# Altium PCB Car2014_finalRev.PcbDoc (part 2 of 2)
Units mm, origin at the board's own origin, x right, y up, seen from the top; angles counter-clockwise.
Board outline 109.6 x 77.2 mm, 4 copper layers (Top Layer, Mid-Layer 1, Mid-Layer 2, Bottom Layer); 157 components, 134 nets, 684 pads, 193 vias.
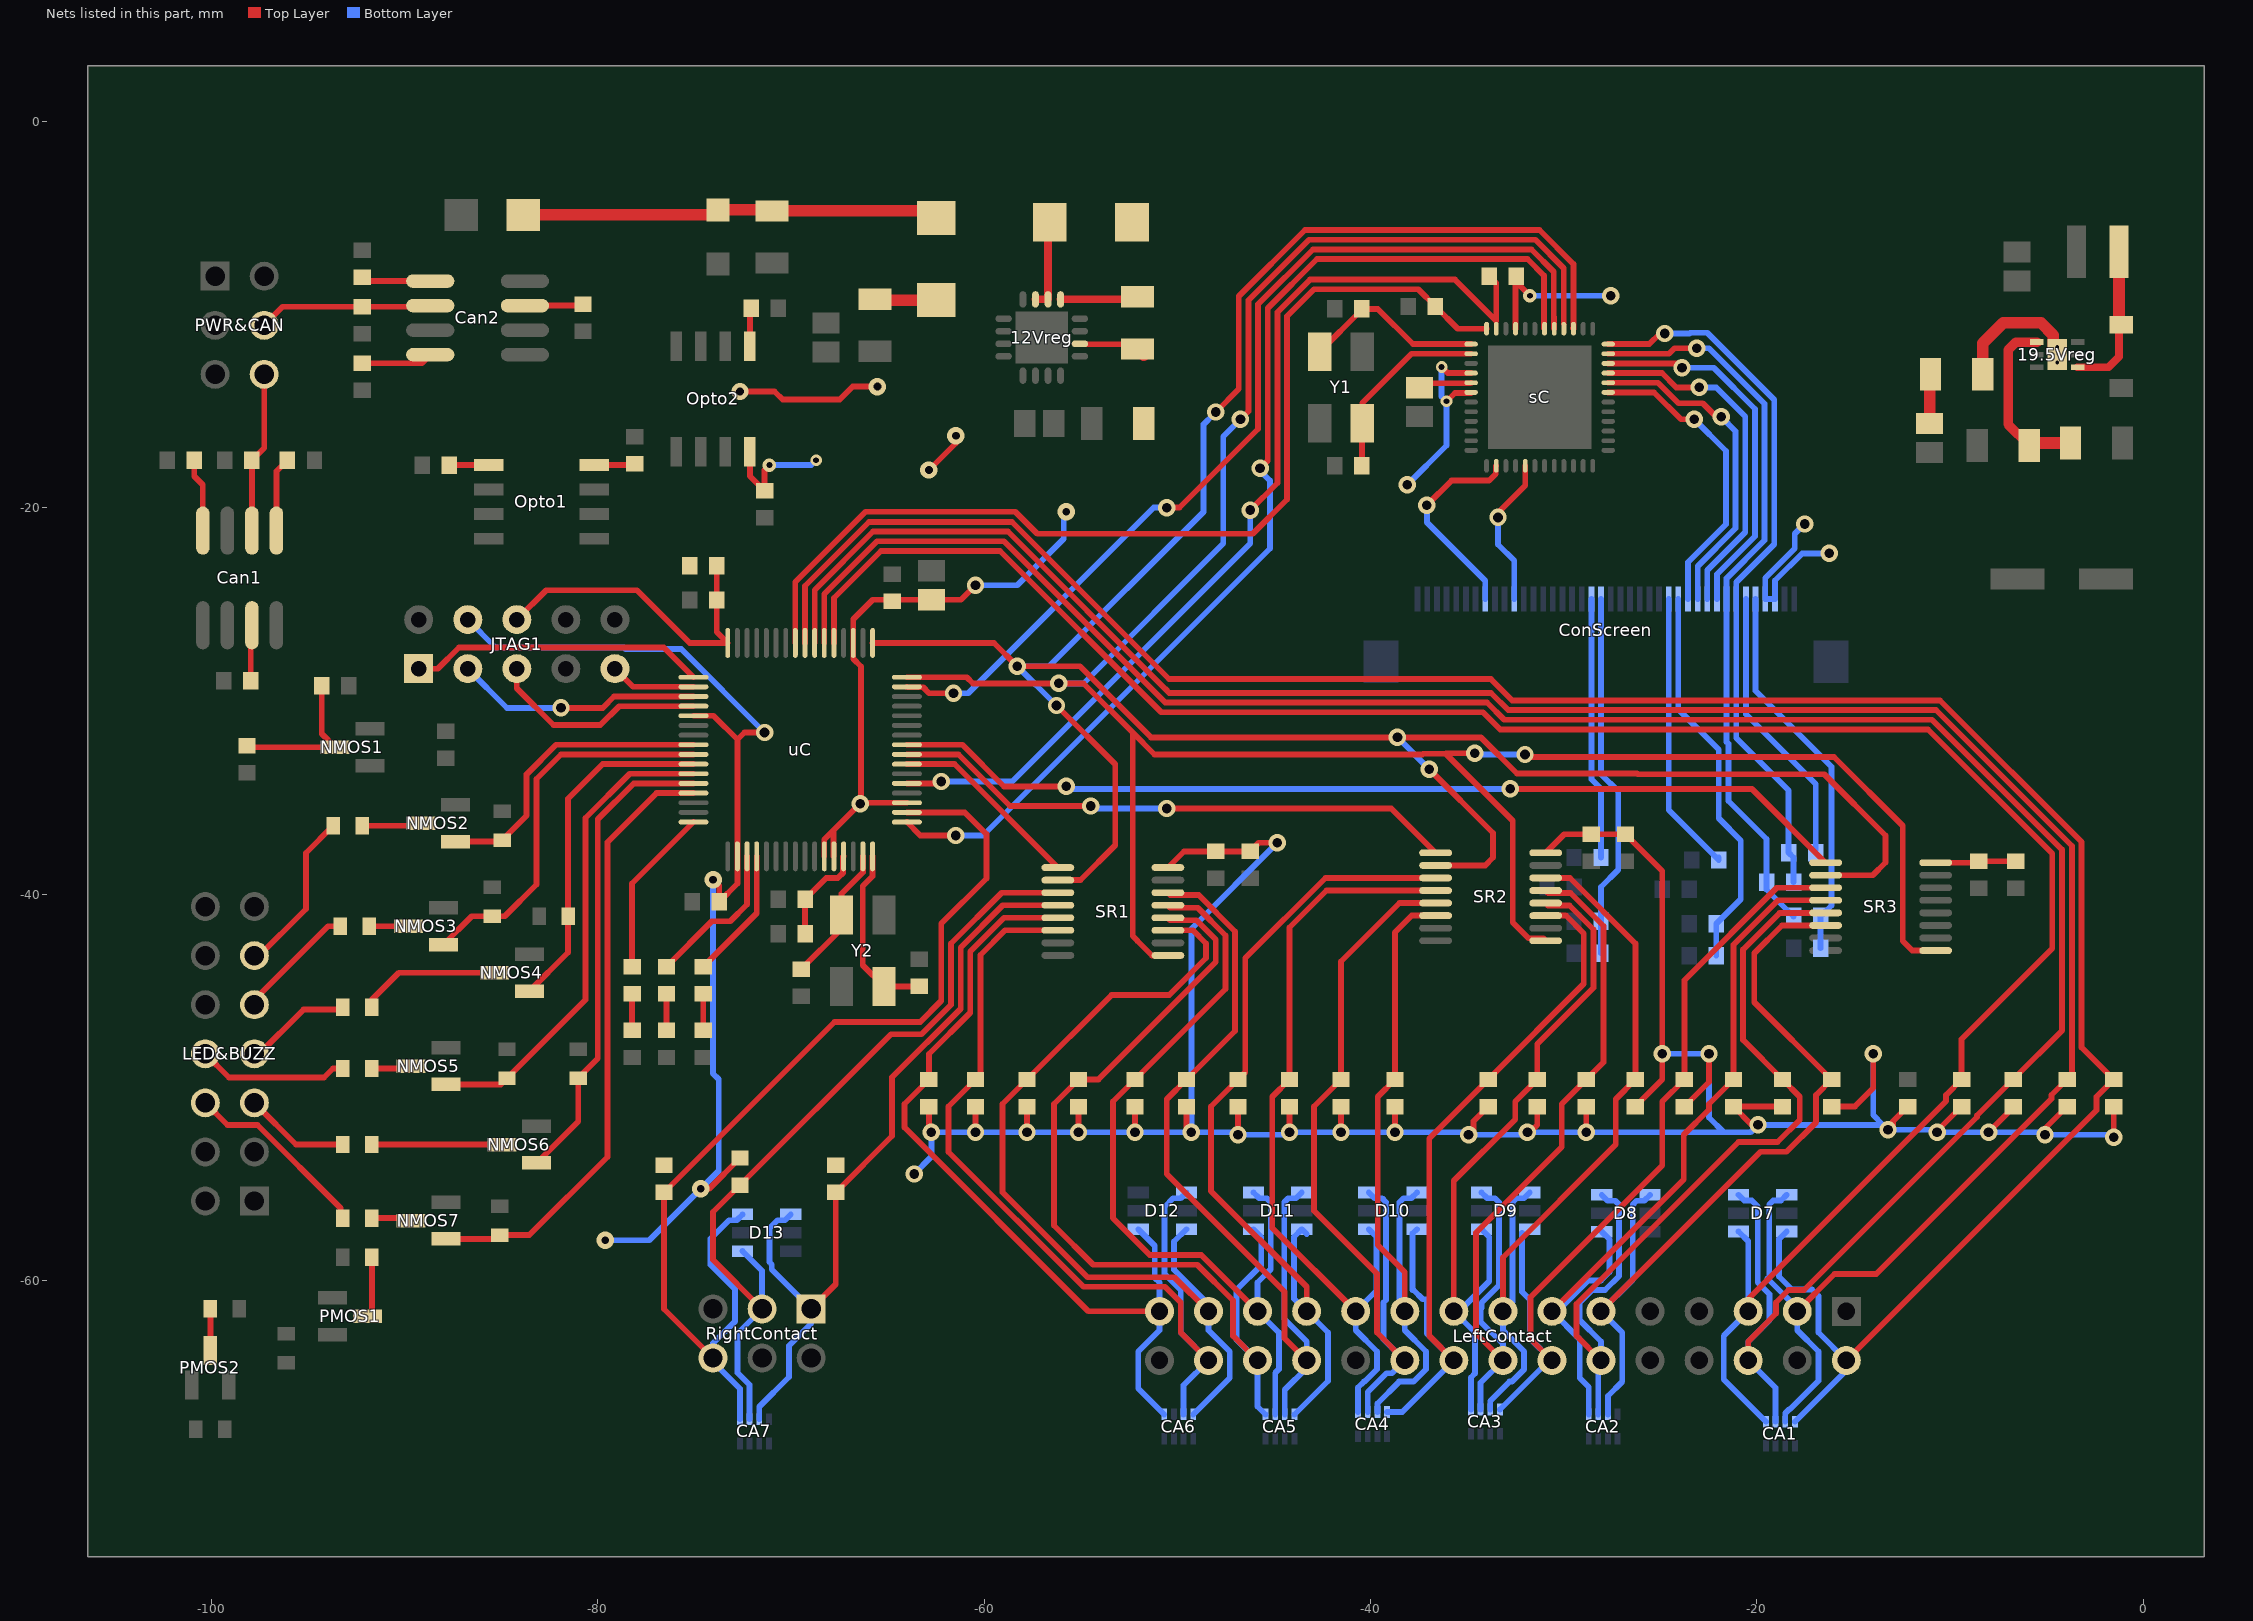
[diagram p4: the nets of this part, all layers, seen from the top]

## Via types
v1: diameter 0.9, hole 0.5, Top Layer to Bottom Layer, 127 vias
v2: diameter 0.5, hole 0.2, Top Layer to Bottom Layer, 36 vias
v3: diameter 0.9, hole 0.4, Top Layer to Bottom Layer, 13 vias
v4: diameter 0.7, hole 0.3, Top Layer to Bottom Layer, 7 vias
v5: diameter 3.5, hole 3.2, Top Layer to Bottom Layer, 4 vias
v6: diameter 0.6, hole 0.3, Top Layer to Bottom Layer, 3 vias
v7: diameter 1.5, hole 0.9, Top Layer to Bottom Layer, 2 vias
v8: diameter 0.8, hole 0.4, Top Layer to Bottom Layer, 1 vias

## Nets (pads, with @x,y where several pads share a name; then routed paths per layer and width w, separated by ;. In a path a pad name is that pad's centre, name@x,y a point inside that pad or via, vN(x,y) a via of type N, cw(c..) or ccw(c..) an arc to the next point about the centre after c; other vN are vias at no path point) (continued)
INTRPT_DCON: R4.1 sC.11 uC.37 | length 50.9
  Top Layer w0.3: uC.37@-64.006,-34.262 -62.329,-34.262 v1(-62.23,-34.163) ; v1(-46.228,-20.109) -44.823,-18.704 -44.823,-9.869 -43.133,-8.179 -35.633,-8.179 -33.492,-10.32 -33.492,-8.356 R4.1@-33.847,-8.001
  Bottom Layer w0.3: v1(-62.23,-34.163) -58.547,-34.163 -46.228,-21.844 v1(-46.228,-20.109)
JOYSTICK1: CA1.4 D7.3 LeftContact.2 R48.2 uC.56 | length 123.7
  Top Layer w0.3: uC.56@-69.281,-26.987 -69.281,-24.035 -65.971,-20.725 -58.569,-20.725 -50.433,-28.861 -33.77,-28.861 -32.665,-29.966 -10.513,-29.966 -3.183,-37.296 -3.183,-47.933 R48.2@-1.524,-49.592 -2.413,-50.481 -2.413,-51.181 LeftContact.2@-15.367,-64.135
  Bottom Layer w0.3: D7.3@-18.453,-57.462 -18.853,-57.862 -18.853,-59.786 -18.175,-60.463 -17.145,-60.463 -16.807,-60.801 -16.807,-62.695 LeftContact.2@-15.367,-64.135 -15.367,-64.652 CA1.4@-18.029,-67.314
JOYSTICK2: CA1.3 D7.1 LeftContact.3 R47.2 uC.55 | length 121.3
  Top Layer w0.3: uC.55@-68.781,-26.987 -68.781,-24.242 -65.764,-21.225 -58.776,-21.225 -50.64,-29.361 -50.635,-29.361 -50.419,-29.577 -33.762,-29.577 -32.873,-30.466 -10.72,-30.466 -3.683,-37.503 -3.683,-49.338 R47.2@-3.937,-49.592 -4.737,-50.392 -4.737,-50.584 -13.816,-59.663 -15.975,-59.663 LeftContact.3@-17.907,-61.595
  Bottom Layer w0.3: CA1.3@-18.529,-67.314 -18.529,-66.869 -18.324,-66.664 -18.277,-66.664 -16.807,-65.194 -16.807,-63.679 -17.907,-62.579 LeftContact.3@-17.907,-61.595 -17.907,-61.439 -19.447,-59.899 -19.353,-59.805 -19.353,-56.067 -19.148,-55.862 -18.753,-55.862 D7.1@-18.453,-55.562
JOYSTICK3: CA1.1 D7.4 LeftContact.5 R45.2 uC.53 | length 114.6
  Top Layer w0.3: uC.53@-67.781,-26.987 -67.781,-24.656 -65.35,-22.225 -59.19,-22.225 -50.838,-30.577 -34.176,-30.577 -33.287,-31.466 -11.134,-31.466 -4.707,-37.893 -4.707,-42.814 -9.398,-47.505 R45.2@-9.398,-49.592 -10.198,-50.392 -10.198,-50.711 -20.447,-60.96 LeftContact.5@-20.447,-61.595
  Bottom Layer w0.3: D7.4@-20.953,-57.462 -20.447,-57.968 LeftContact.5@-20.447,-61.595 -21.717,-62.865 -21.717,-65.126 CA1.1@-19.529,-67.314
JOYSTICK4: CA1.2 D7.6 LeftContact.6 R46.2 uC.54 | length 121.7
  Top Layer w0.3: uC.54@-68.281,-26.987 -68.281,-24.449 -65.557,-21.725 -58.983,-21.725 -50.631,-30.077 -33.969,-30.077 -33.08,-30.966 -10.927,-30.966 -4.207,-37.686 -4.207,-47.036 -4.191,-47.052 R46.2@-6.731,-49.592 -8.598,-51.459 -8.598,-51.537 -17.556,-60.495 -18.363,-60.495 -19.007,-61.139 -19.007,-61.711 -20.447,-63.151 LeftContact.6@-20.447,-64.135
  Bottom Layer w0.3: D7.6@-20.953,-55.562 -20.653,-55.862 -20.258,-55.862 -19.947,-56.173 -19.947,-60.106 -19.347,-60.706 -19.347,-62.051 -20.447,-63.151 LeftContact.6@-20.447,-64.135 -19.029,-65.553 CA1.2@-19.029,-67.314
JTAG_RESET: C20.2 JTAG1.8 R11.2 uC.64 | length 16.9
  Top Layer w0.3: JTAG1.8@-84.201,-25.781 -82.677,-24.257 -77.978,-24.257 -75.248,-26.987 uC.64@-73.281,-26.987 -73.849,-26.419 C20.2@-73.849,-24.765 R11.2@-73.849,-22.987
JTAG_TCK: JTAG1.1 uC.1 | length 15.3
  Top Layer w0.3: JTAG1.1@-89.281,-28.321 -88.297,-28.321 -87.197,-27.221 -76.597,-27.221 uC.1@-75.056,-28.762
JTAG_TDI: JTAG1.5 uC.2 | length 4.5
  Top Layer w0.3: JTAG1.5@-79.121,-28.321 -78.18,-29.262 uC.2@-75.056,-29.262
JTAG_TDO: JTAG1.2 uC.3 | length 12.8
  Top Layer w0.3: v1(-81.915,-30.353) -79.756,-30.353 -79.165,-29.762 uC.3@-75.056,-29.762
  Bottom Layer w0.3: JTAG1.2@-86.741,-28.321 -84.709,-30.353 v1(-81.915,-30.353)
JTAG_TMS: JTAG1.3 uC.4 | length 11.4
  Top Layer w0.3: JTAG1.3@-84.201,-28.321 -84.201,-29.337 -82.296,-31.242 -79.883,-31.242 -78.903,-30.262 uC.4@-75.056,-30.262
KERS1: CA2.3 D8.4 LeftContact.11 R43.1 SR3.6 | length 43.6
  Top Layer w0.3: LeftContact.11@-28.067,-61.595 -19.804,-53.332 -18.462,-53.332 -16.929,-51.799 -16.929,-50.392 R43.1@-16.129,-49.592 -20.133,-45.588 -20.133,-43.056 -18.692,-41.615 SR3.6@-16.439,-41.615
  Bottom Layer w0.3: CA2.3@-27.707,-66.933 -27.707,-65.975 -26.967,-65.235 -26.967,-62.695 LeftContact.11@-28.067,-61.595 -26.429,-59.957 -26.429,-56.073 -26.224,-55.868 -25.829,-55.868 D8.4@-25.529,-55.568
KERS2: CA3.4 D9.6 LeftContact.14 R40.1 SR3.3 | length 43.7
  Top Layer w0.3: LeftContact.14@-30.607,-64.135 -31.714,-63.028 -31.714,-60.869 -24.892,-54.047 -24.892,-50.735 R40.1@-23.749,-49.592 -23.749,-44.45 -18.964,-39.665 SR3.3@-16.439,-39.665
  Bottom Layer w0.3: CA3.4@-33.303,-66.679 -30.759,-64.135 LeftContact.14@-30.607,-64.135 -31.752,-62.99 -31.752,-60.979 -32.152,-60.579 D9.6@-32.152,-57.531
KERS3: CA2.1 D8.1 LeftContact.13 R41.1 SR3.4 | length 40.8
  Top Layer w0.3: LeftContact.13@-30.607,-61.595 -23.787,-54.775 -23.787,-52.451 -22.479,-51.143 -22.479,-50.862 R41.1@-21.209,-49.592 -21.209,-42.617 -18.907,-40.315 SR3.4@-16.439,-40.315
  Bottom Layer w0.3: CA2.1@-28.707,-66.933 -28.707,-65.511 -29.167,-65.051 -29.167,-63.035 LeftContact.13@-30.607,-61.595 -30.33,-61.595 -28.73,-59.995 -28.063,-59.995 -27.629,-59.561 -27.629,-57.868 D8.1@-28.029,-57.468
KERS4: CA2.2 D8.3 LeftContact.12 R42.1 SR3.5 | length 47.8
  Top Layer w0.3: LeftContact.12@-28.067,-64.135 -29.337,-62.865 -29.337,-61.214 -20.955,-52.832 -18.923,-52.832 -17.78,-51.689 -17.78,-50.481 R42.1@-18.669,-49.592 -20.709,-47.552 -20.709,-42.855 -18.819,-40.965 SR3.5@-16.439,-40.965
  Bottom Layer w0.3: CA2.2@-28.207,-66.933 -28.207,-64.275 LeftContact.12@-28.067,-64.135 -28.067,-63.151 -29.167,-62.051 -29.167,-61.139 -28.523,-60.495 -27.856,-60.495 -27.129,-59.768 -27.129,-56.073 -27.334,-55.868 -27.729,-55.868 D8.3@-28.029,-55.568
KERS5: CA3.3 D9.4 LeftContact.15 R39.1 SR2.14 | length 41.2
  Top Layer w0.3: LeftContact.15@-33.147,-61.595 -33.147,-58.801 -27.305,-52.959 -27.305,-50.608 R39.1@-26.289,-49.592 -26.289,-42.545 -29.677,-39.157 SR2.14@-30.932,-39.157
  Bottom Layer w0.3: CA3.3@-33.803,-66.679 -33.803,-66.234 -32.804,-65.235 -32.691,-65.235 -32.047,-64.591 -32.047,-63.679 -33.147,-62.579 LeftContact.15@-33.147,-61.595 -32.652,-61.1 -32.652,-55.946 -32.447,-55.741 -32.052,-55.741 D9.4@-31.752,-55.441
KERS6: CA4.4 D10.6 LeftContact.18 R36.1 SR2.11 | length 40.8
  Top Layer w0.3: LeftContact.18@-35.687,-64.135 -36.957,-62.865 -36.957,-52.64 R36.1@-33.909,-49.592 -28.956,-44.639 -28.956,-42.037 -29.886,-41.107 SR2.11@-30.932,-41.107
  Bottom Layer w0.3: CA4.4@-39.145,-66.806 -38.358,-66.806 LeftContact.18@-35.687,-64.135 -37.084,-62.738 -37.084,-60.968 -37.298,-60.968 -37.771,-60.495 -37.824,-60.495 -37.824,-57.571 D10.6@-37.594,-57.341
KERS7: CA3.2 D9.3 LeftContact.16 R38.1 SR2.13 | length 42.7
  Top Layer w0.3: LeftContact.16@-33.147,-64.135 -34.544,-62.738 -34.544,-57.531 -30.099,-53.086 -30.099,-50.862 R38.1@-28.829,-49.592 -27.94,-48.703 -27.94,-41.639 -29.647,-39.932 -30.807,-39.932 SR2.13@-30.932,-39.807
  Bottom Layer w0.3: CA3.2@-34.303,-66.679 -34.303,-65.291 LeftContact.16@-33.147,-64.135 -33.147,-63.289 -34.29,-62.146 -34.29,-61.468 -34.247,-61.425 -34.247,-61.139 -33.352,-60.244 -33.352,-55.946 -33.557,-55.741 -33.952,-55.741 D9.3@-34.252,-55.441
KERS8: CA4.3 D10.4 LeftContact.19 R35.1 SR2.6 | length 37
  Top Layer w0.3: LeftContact.19@-38.227,-61.595 -38.227,-59.563 -39.624,-58.166 -39.624,-50.481 R35.1@-38.735,-49.592 -38.735,-41.973 -37.869,-41.107 SR2.6@-36.632,-41.107
  Bottom Layer w0.3: CA4.3@-39.645,-66.806 -39.645,-66.361 -38.519,-65.235 -37.771,-65.235 -37.127,-64.591 -37.127,-63.679 -38.227,-62.579 LeftContact.19@-38.227,-61.595 -38.494,-61.328 -38.494,-55.946 -38.289,-55.741 -37.894,-55.741 D10.4@-37.594,-55.441
KERS9: CA3.1 D9.1 LeftContact.17 R37.1 SR2.12 | length 36.9
  Top Layer w0.3: LeftContact.17@-35.568,-61.476 LeftContact.17@-35.687,-61.595 -35.687,-54.838 -32.512,-51.663 -32.512,-50.735 R37.1@-31.369,-49.592 -31.369,-47.759 -28.456,-44.846 -28.456,-41.83 -29.704,-40.582 -30.807,-40.582 SR2.12@-30.932,-40.457
  Bottom Layer w0.3: CA3.1@-34.803,-66.679 -34.803,-65.023 -34.587,-64.807 -34.587,-62.695 LeftContact.17@-35.687,-61.595 -35.41,-61.595 -33.852,-60.037 -33.852,-57.741 D9.1@-34.252,-57.341
L1CAN: Can1.6 PWR&CAN.6 R7.1 | length 8.4
  Top Layer w0.3: Can1.6@-97.917,-21.172 -97.914,-21.169 R7.1@-97.914,-17.526 -97.282,-16.894 PWR&CAN.6@-97.282,-13.081
L2CAN: Can2.6 PWR&CAN.4 R1.1 | length 9
  Top Layer w0.3: PWR&CAN.4@-97.282,-10.541 -96.328,-9.587 R1.1@-92.202,-9.587 -88.745,-9.587 Can2.6@-88.683,-9.525
LC_IN: CA7.1 D13.6 R50.2 RightContact.6 uC.34 | length 55.4
  Top Layer w0.3: RightContact.6@-74.041,-64.008 -76.581,-61.468 R50.2@-76.581,-55.437 -67.753,-46.609 -63.318,-46.609 -62.222,-45.513 -62.222,-41.521 -59.887,-39.186 -59.887,-36.887 -61.012,-35.762 uC.34@-64.006,-35.762
  Bottom Layer w0.3: CA7.1@-72.649,-67.187 -72.649,-65.599 -74.041,-64.207 RightContact.6@-74.041,-64.008 -74.041,-63.246 -72.898,-62.103 -72.898,-60.452 -74.168,-59.182 -74.168,-57.836 -73.21,-56.878 -72.815,-56.878 D13.6@-72.515,-56.578
LC_LED: LED&BUZZ.6 R53.1 | length 10
  Top Layer w0.3: LED&BUZZ.6@-100.33,-50.8 -99.187,-51.943 -97.631,-51.943 -93.313,-56.261 -93.313,-56.662 R53.1@-93.206,-56.769 R53.1@-93.206,-56.599
LED1: D4.1 uC.16 | length 8.8
  Top Layer w0.3: D4.1@-78.232,-43.75 -78.232,-39.438 uC.16@-75.056,-36.262
LED2: D5.1 uC.19 | length 8
  Top Layer w0.3: D5.1@-76.454,-43.75 -74.106,-41.402 -73.152,-41.402 -72.281,-40.531 uC.19@-72.281,-38.037
LED3: D6.1 uC.20 | length 6.9
  Top Layer w0.3: D6.1@-74.549,-43.75 -71.781,-40.982 uC.20@-71.781,-38.037
LED_1: LED&BUZZ.9 R16.2 | length 6.2
  Top Layer w0.3: LED&BUZZ.9@-98.171,-45.847 -93.98,-41.656 -93.714,-41.656
LED_2: LED&BUZZ.7 R19.2 | length 5.5
  Top Layer w0.3: LED&BUZZ.7@-97.663,-48.387 -95.25,-45.974 -93.333,-45.974 R19.2@-93.206,-45.847
LED_3: LED&BUZZ.8 R20.2 | length 7.8
  Top Layer w0.3: LED&BUZZ.8@-100.33,-48.26 -99.103,-49.487 -94.179,-49.487 -93.714,-49.022 R20.2@-93.206,-49.022
LED_4: LED&BUZZ.5 R49.2 | length 5.3
  Top Layer w0.3: LED&BUZZ.5@-97.663,-50.927 -95.631,-52.959 R49.2@-93.206,-52.959
LED_5: LED&BUZZ.11 R14.2 | length 8.5
  Top Layer w0.3: LED&BUZZ.11@-97.663,-43.307 -95.123,-40.767 -95.123,-37.858 R14.2@-93.714,-36.449
MISO: sC.4 SR1.9 SR2.9 SR3.9 uC.48 | length 133.2
  Top Layer w0.3: uC.48@-64.006,-28.762 -60.9,-28.762 -60.579,-29.083 v1@-56.388,-29.083 ; v1(-56.134,-29.083) -54.864,-29.083 -52.316,-31.631 ; SR1.9@-50.49,-43.169 -51.319,-43.169 -52.07,-42.418 -52.07,-42.414 -52.316,-42.168 -52.316,-31.631 ; v1(-46.736,-15.41) -46.323,-14.997 -46.323,-9.248 -43.187,-6.112 -31.463,-6.112 -29.992,-7.583 sC.4@-29.992,-10.46 ; v1(-34.608,-32.703) -36.081,-32.703 -36.106,-32.728 ; v1(-32.004,-32.766) -31.877,-32.893 -16.002,-32.893 -12.446,-36.449 -12.446,-42.418 -11.949,-42.915 SR3.9@-10.739,-42.915 ; SR2.9@-30.932,-42.407 -31.057,-42.282 -31.824,-42.282 -32.639,-41.467 -32.639,-36.195 -36.106,-32.728 ; -52.316,-31.631 -51.181,-32.766 -37.326,-32.766 -37.288,-32.728 -36.106,-32.728
  Bottom Layer w0.3: v1(-56.134,-29.083) -54.864,-29.083 -47.625,-21.844 -47.625,-16.299 v1(-46.736,-15.41) ; v1(-34.608,-32.703) -34.544,-32.766 v1(-32.004,-32.766)
MOSI: sC.5 uC.47 | length 51
  Top Layer w0.3: uC.47@-64.006,-29.262 -63.981,-29.287 -63.159,-29.287 -62.855,-29.591 v1(-61.595,-29.591) ; v1(-50.546,-19.982) -49.887,-19.982 -45.823,-15.918 -45.823,-9.455 -42.98,-6.612 -31.67,-6.612 -30.517,-7.765 -30.517,-10.692 sC.5@-30.492,-10.717 -30.492,-10.113
  Bottom Layer w0.3: v1(-61.595,-29.591) -60.833,-29.591 -51.224,-19.982 v1(-50.546,-19.982)
Net12Vreg_13: 12Vreg.13 R3.1 | length 4
  Top Layer w0.4: 12Vreg.13@-56.048,-9.201 -52.207,-9.201 R3.1@-52.07,-9.064
Net12Vreg_14: 12Vreg.14 12Vreg.15 L2.1 | length 4.7
  Top Layer w0.4: 12Vreg.15@-57.348,-9.201 12Vreg.14@-56.698,-9.201 -56.698,-5.297 L2.1@-56.608,-5.207
Net19.5Vreg_1: 19.5Vreg.1 R9.2 R10.1 | length 9.2
  Top Layer w0.5: R9.2@-5.889,-16.764 -6.985,-15.668 -6.985,-11.811 -6.589,-11.415 19.5Vreg.1@-5.495,-11.415
  Top Layer w0.6: R9.2@-5.889,-16.764 -5.762,-16.637 R10.1@-3.763,-16.637
Net19.5Vreg_4: 19.5Vreg.4 D3.1 L3.2 | length 7.8
  Top Layer w0.4: 19.5Vreg.4@-3.395,-12.715 -1.793,-12.715 -1.248,-12.17 D3.1@-1.248,-10.411
  Top Layer w0.6: D3.1@-1.248,-10.411 L3.2@-1.248,-6.731
Net19.5Vreg_7: 19.5Vreg.7 R5.1 | length 7.1
  Top Layer w0.6: R5.1@-8.302,-13.081 -8.302,-11.477 -7.239,-10.414 -5.289,-10.414 -4.645,-11.058 -4.645,-11.865 19.5Vreg.7@-4.445,-12.065
  other v2: -4.445,-12.465 -4.445,-11.665
NetC4_2: C7.2 sC.13 Y1.3 | length 9.5
  Top Layer w0.3: Y1.3@-42.629,-11.909 -40.448,-9.728 C7.2@-40.448,-9.695 -39.624,-9.695 -37.802,-11.517 sC.13@-34.792,-11.517
NetC5_2: C16.2 sC.14 Y1.1 | length 10
  Top Layer w0.3: C16.2@-40.448,-17.823 -40.448,-15.628 Y1.1@-40.429,-15.609 -40.429,-14.564 -37.882,-12.017 sC.14@-34.792,-12.017
NetC7_2: C10.2 sC.17 | length 2.8
  Top Layer w0.3: C10.2@-37.465,-13.771 -37.236,-13.542 -34.817,-13.542 sC.17@-34.792,-13.517
NetC8_2: C32.2 uC.32 Y2.3 | length 9.2
  Top Layer w0.3: uC.32@-65.781,-38.037 -65.781,-39.066 -66.294,-39.579 -66.294,-43.676 Y2.3@-65.194,-44.776 -65.187,-44.769 C32.2@-63.373,-44.769
NetC9_2: C33.2 uC.31 Y2.1 | length 7.2
  Top Layer w0.3: C33.2@-69.469,-43.877 -67.394,-41.802 Y2.1@-67.394,-41.076 -67.394,-39.972 -66.281,-38.859 uC.31@-66.281,-38.037
NetC11_1: C30.1 C31.1 uC.29 | length 5.2
  Top Layer w0.3: C31.1@-69.277,-42.037 C30.1@-69.277,-40.259 -68.18,-39.162 -67.584,-39.162 -67.306,-38.884 -67.306,-38.062 uC.29@-67.281,-38.037
NetC26_1: C1.1 D1.2 D2.K L1.1 | length 21.6
  Top Layer w0.6: D1.2@-83.866,-4.826 -74.044,-4.826 D2.K@-73.787,-4.569 -71.043,-4.569 C1.1@-70.993,-4.619 -62.725,-4.619 L1.1@-62.484,-4.86
NetC37_2: C11.2 R5.2 | length 2.6
  Top Layer w0.6: C11.2@-11.049,-15.633 -11.049,-13.128 R5.2@-11.002,-13.081
NetCan1_8: Can1.8 R6.1 | length 3.8
  Top Layer w0.3: R6.1@-100.9,-17.526 -100.9,-18.353 -100.457,-18.796 Can1.8@-100.457,-21.172
NetCan2_8: Can2.8 R8.1 | length 3.7
  Top Layer w0.3: R8.1@-92.202,-12.508 -89.126,-12.508 Can2.8@-88.683,-12.065
NetConScreen_5: ConScreen.5 R65.2 R68.2 | length 20
  Bottom Layer w0.3: ConScreen.5@-20.063,-24.707 -20.063,-29.467 -16.129,-33.401 -16.129,-40.578 R65.2@-16.699,-41.148 R68.2@-16.699,-42.799
NetConScreen_6: ConScreen.6 R59.1 | length 14.6
  Bottom Layer w0.3: ConScreen.6@-20.563,-24.707 -20.563,-30.68 -16.953,-34.29 R59.1@-16.953,-37.846
NetConScreen_13: ConScreen.13 R66.1 R69.1 | length 20.3
  Bottom Layer w0.3: ConScreen.13@-24.063,-24.707 -24.063,-30.42 -21.971,-32.512 -21.971,-36.068 -20.828,-37.211 -20.828,-40.259 R66.1@-22.098,-41.529 R69.1@-22.098,-43.18
NetConScreen_14: ConScreen.14 R60.1 | length 14.7
  Bottom Layer w0.3: ConScreen.14@-24.563,-24.707 -24.563,-35.635 R60.1@-21.971,-38.227 R60.1@-21.971,-38.09
NetConScreen_21: ConScreen.21 R67.2 R70.1 | length 19.1
  Bottom Layer w0.3: R70.1@-28.067,-43.053 R67.2@-28.067,-41.402 -28.067,-39.624 -27.178,-38.735 -27.178,-34.671 -28.063,-33.786 ConScreen.21@-28.063,-24.707
NetConScreen_22: ConScreen.22 R61.2 | length 13.6
  Bottom Layer w0.3: ConScreen.22@-28.563,-24.707 -28.563,-34.048 -28.067,-34.544 R61.2@-28.067,-38.1
NetD1_2: D4.2 R23.2 | length 1.9
  Top Layer w0.3: R23.2@-78.232,-47.052 D4.2@-78.232,-45.15
NetD2_2: D5.2 R24.2 | length 1.9
  Top Layer w0.3: R24.2@-76.454,-47.052 D5.2@-76.454,-45.15
NetD3_2: D6.2 R25.2 | length 1.9
  Top Layer w0.3: R25.2@-74.549,-47.052 D6.2@-74.549,-45.15
NetD15_1: D14.1 NMOS1.3 R12.2 | length 8
  Top Layer w0.3: R12.2@-98.171,-32.32 -98.106,-32.385 NMOS1.3@-93.61,-32.385 -94.299,-31.696 D14.1@-94.299,-29.21
NetL2_2: L1.2 R2.2 | length 3.2
  Top Layer w0.6: R2.2@-65.659,-9.191 -65.613,-9.237 L1.2@-62.484,-9.237
NetNMOS3_3: NMOS7.3 R53.2 | length 2.1
  Top Layer w0.3: R53.2@-91.706,-56.769 -89.8,-56.769 NMOS7.3@-89.673,-56.896
NetNMOS4_3: NMOS5.3 R20.1 | length 2.1
  Top Layer w0.3: R20.1@-91.706,-49.022 -89.8,-49.022 NMOS5.3@-89.673,-48.895
NetNMOS5_3: NMOS3.3 R16.1 | length 2
  Top Layer w0.3: R16.1@-91.833,-41.656 NMOS3.3@-89.8,-41.656
NetNMOS6_3: NMOS6.3 R49.1 | length 6.7
  Top Layer w0.3: R49.1@-91.706,-52.959 NMOS6.3@-84.974,-52.959
NetNMOS7_3: NMOS4.3 R19.1 | length 7.3
  Top Layer w0.3: R19.1@-91.706,-45.847 -91.706,-45.466 -90.309,-44.069 NMOS4.3@-85.355,-44.069
NetNMOS8_3: NMOS2.3 R14.1 | length 3.1
  Top Layer w0.3: R14.1@-92.214,-36.449 -89.292,-36.449 NMOS2.3@-89.165,-36.322
NetPMOS1_3: PMOS1.3 R54.1 | length 3.2
  Top Layer w0.3: PMOS1.3@-91.96,-61.826 PMOS1.3@-91.937,-61.849 -91.706,-61.618 R54.1@-91.706,-58.801
NetPMOS2_3: PMOS2.3 R56.2 | length 2.2
  Top Layer w0.3: PMOS2.3@-100.076,-63.616 -100.064,-63.604 R56.2@-100.064,-61.468
PCLK: ConScreen.30 sC.29 | length 7.6
  Top Layer w0.3: v1@-33.393,-20.236 -31.992,-18.835 sC.29@-31.992,-17.817
  Bottom Layer w0.3: v1(-33.401,-20.49) -33.401,-21.887 -32.563,-22.725 ConScreen.30@-32.563,-24.707
POWER_DOWN: C8.2 sC.12 uC.57 | length 52.6
  Top Layer w0.3: uC.57@-69.781,-26.987 -69.781,-23.827 -66.147,-20.193 -58.394,-20.193 -57.251,-21.336 -46.101,-21.336 -44.323,-19.558 -44.323,-10.076 -42.926,-8.679 -37.527,-8.679 C8.2@-36.638,-9.568 -35.489,-10.717 sC.12@-33.992,-10.717
R0: ConScreen.7 R59.2 R62.1 sC.48 | length 37.3
  Top Layer w0.3: sC.48@-27.692,-11.517 -25.571,-11.517 -25.019,-10.965 v1(-24.765,-10.965)
  Bottom Layer w0.3: v1(-24.765,-10.965) -23.483,-10.965 -23.445,-10.927 -22.572,-10.927 -19.098,-14.401 -19.098,-21.882 -21.063,-23.847 ConScreen.7@-21.063,-24.707 -21.063,-31.914 -18.353,-34.624 R59.2@-18.353,-37.846 -18.096,-38.103 R62.1@-18.096,-39.37
R1: ConScreen.8 R62.2 R65.1 sC.47 | length 38.2
  Top Layer w0.3: sC.47@-27.692,-12.017 -24.547,-12.017 -24.257,-11.727 v1(-23.114,-11.727)
  Bottom Layer w0.3: v1(-23.114,-11.727) -22.479,-11.727 -19.598,-14.608 -19.598,-21.675 -21.563,-23.64 ConScreen.8@-21.563,-24.707 -21.563,-32.121 -21.471,-32.213 -21.471,-35.171 -19.496,-37.146 R62.2@-19.496,-39.37 -19.496,-39.751 R65.1@-18.099,-41.148
R2: ConScreen.9 sC.46 | length 19.2
  Top Layer w0.3: sC.46@-27.692,-12.517 -24.102,-12.517 v1(-23.876,-12.743)
  Bottom Layer w0.3: v1(-23.876,-12.743) -22.225,-12.743 -20.098,-14.87 -20.098,-21.468 -22.063,-23.433 ConScreen.9@-22.063,-24.707
R3: ConScreen.10 sC.45 | length 18.3
  Top Layer w0.3: sC.45@-27.692,-13.017 -24.91,-13.017 -24.168,-13.759 v1(-22.987,-13.759)
  Bottom Layer w0.3: v1(-22.987,-13.759) -22.098,-13.759 -20.598,-15.259 -20.598,-21.261 -22.563,-23.226 ConScreen.10@-22.563,-24.707
R4: ConScreen.11 sC.44 | length 17.1
  Top Layer w0.3: sC.44@-27.692,-13.517 -25.117,-13.517 -24.058,-14.576 -22.805,-14.576 -22.098,-15.283 v1(-21.844,-15.283)
  Bottom Layer w0.3: ConScreen.11@-23.063,-24.707 -23.063,-23.019 -21.098,-21.054 -21.098,-16.029 v1(-21.844,-15.283)
R5: ConScreen.12 sC.43 | length 15.8
  Top Layer w0.3: sC.43@-27.692,-14.017 -25.324,-14.017 -23.931,-15.41 v1(-23.241,-15.41)
  Bottom Layer w0.3: ConScreen.12@-23.563,-24.707 -23.563,-22.812 -21.598,-20.847 -21.598,-17.053 v1(-23.241,-15.41)
SLIPREF1: CA4.2 D10.3 LeftContact.20 R34.1 SR2.5 | length 42.8
  Top Layer w0.3: LeftContact.20@-38.227,-64.135 -39.667,-62.695 -39.667,-59.647 -42.926,-56.388 -42.926,-50.989 R34.1@-41.529,-49.592 -41.529,-43.482 -38.504,-40.457 SR2.5@-36.632,-40.457
  Bottom Layer w0.3: CA4.2@-40.145,-66.806 -40.145,-65.776 -39.167,-64.798 -38.89,-64.798 LeftContact.20@-38.227,-64.135 -39.327,-63.035 -39.327,-61.139 -39.194,-61.006 -39.194,-55.946 -39.399,-55.741 -39.794,-55.741 D10.3@-40.094,-55.441
SLIPREF2: CA4.1 D10.1 LeftContact.21 R33.1 SR2.4 | length 41.3
  Top Layer w0.3: LeftContact.21@-40.767,-61.595 -45.085,-57.277 -45.085,-50.481 R33.1@-44.196,-49.592 -44.196,-41.728 -42.275,-39.807 SR2.4@-36.632,-39.807
  Bottom Layer w0.3: CA4.1@-40.645,-66.806 -40.645,-65.537 -40.343,-65.235 -40.311,-65.235 -39.667,-64.591 -39.667,-63.679 -40.767,-62.579 LeftContact.21@-40.767,-61.595 -39.694,-60.522 -39.694,-57.741 D10.1@-40.094,-57.341
SLIPREF3: CA5.3 D11.4 LeftContact.24 R31.1 SR1.14 | length 44
  Top Layer w0.3: SR1.14@-50.49,-39.919 -50.365,-40.044 -48.894,-40.044 -47.014,-41.924 -47.014,-47.076 R31.1@-49.53,-49.592 -50.546,-50.608 -50.546,-54.483 -44.45,-60.579 -44.45,-62.992 LeftContact.24@-43.307,-64.135
  Bottom Layer w0.3: CA5.3@-44.437,-66.933 -44.437,-65.659 -43.307,-64.529 LeftContact.24@-43.307,-64.135 -43.307,-63.151 -44.463,-61.995 -44.463,-55.946 -44.258,-55.741 -43.863,-55.741 D11.4@-43.563,-55.441
SLIPREF4: CA5.4 D11.6 LeftContact.23 R32.1 SR2.3 | length 44.2
  Top Layer w0.3: LeftContact.23@-43.307,-61.595 -43.307,-60.325 -48.26,-55.372 -48.26,-50.989 R32.1@-46.863,-49.592 -46.482,-49.211 -46.482,-43.307 -42.332,-39.157 SR2.3@-36.632,-39.157
  Bottom Layer w0.3: CA5.4@-43.937,-66.933 -42.207,-65.203 -42.207,-62.695 LeftContact.23@-43.307,-61.595 -43.963,-60.939 -43.963,-57.741 D11.6@-43.563,-57.341 D11.6@-43.307,-57.597
SLIPREF5: CA5.1 D11.1 LeftContact.26 R29.1 SR1.12 | length 47.2
  Top Layer w0.3: SR1.12@-50.49,-41.219 -50.365,-41.344 -49.008,-41.344 -48.014,-42.338 -48.014,-43.514 -54.092,-49.592 R29.1@-55.118,-49.592 -56.388,-50.862 -56.388,-57.15 -54.356,-59.182 -48.967,-59.182 -47.117,-61.032 -47.117,-62.865 LeftContact.26@-45.847,-64.135
  Bottom Layer w0.3: D11.1@-46.063,-57.341 -45.663,-57.741 -45.663,-59.211 -46.947,-60.495 -46.947,-63.035 LeftContact.26@-45.847,-64.135 -45.847,-66.523 CA5.1@-45.437,-66.933
SLIPREF6: CA6.3 D12.4 LeftContact.28 R27.1 SR1.6 | length 47.9
  Top Layer w0.3: SR1.6@-56.19,-41.869 -58.925,-41.869 -60.198,-43.142 -60.198,-49.338 R27.1@-60.452,-49.592 -61.849,-50.989 -61.849,-53.34 -54.864,-60.325 -50.641,-60.325 -49.827,-61.139 -49.827,-62.695 LeftContact.28@-48.387,-64.135
  Bottom Layer w0.3: CA6.3@-49.678,-66.933 -49.678,-65.426 LeftContact.28@-48.387,-64.135 -49.827,-62.695 -49.827,-60.495 -50.673,-59.649 -50.673,-56.187 -50.227,-55.741 -49.832,-55.741 D12.4@-49.532,-55.441
SLIPREF7: CA5.2 D11.3 LeftContact.25 R30.1 SR1.13 | length 43.1
  Top Layer w0.3: SR1.13@-50.49,-40.569 -50.365,-40.694 -48.951,-40.694 -47.514,-42.131 -47.514,-44.909 R30.1@-52.197,-49.592 -53.34,-50.735 -53.34,-56.769 -51.435,-58.674 -48.768,-58.674 LeftContact.25@-45.847,-61.595
  Bottom Layer w0.3: D11.3@-46.063,-55.441 -45.763,-55.741 -45.368,-55.741 -45.163,-55.946 -45.163,-59.418 -45.847,-60.102 LeftContact.25@-45.847,-61.595 -44.747,-62.695 -44.747,-64.591 -44.937,-64.781 CA5.2@-44.937,-66.933
SLIPREF8: CA6.1 D12.1 LeftContact.29 R26.1 SR1.5 | length 44
  Top Layer w0.3: SR1.5@-56.19,-41.219 -58.982,-41.219 -60.722,-42.959 -60.722,-46.134 -62.865,-48.277 R26.1@-62.865,-49.592 -64.135,-50.862 -64.135,-52.07 -54.61,-61.595 LeftContact.29@-50.927,-61.595
  Bottom Layer w0.3: D12.1@-52.032,-57.341 -51.173,-58.2 -51.173,-59.856 -50.927,-60.102 LeftContact.29@-50.927,-61.595 -50.927,-62.579 -52.027,-63.679 -52.027,-65.584 CA6.1@-50.678,-66.933
SLIPREF9: CA6.4 D12.6 LeftContact.27 R28.1 SR1.11 | length 46.3
  Top Layer w0.3: SR1.11@-50.49,-41.869 -49.19,-41.869 -48.514,-42.545 -48.514,-43.307 -50.419,-45.212 -53.405,-45.212 R28.1@-57.785,-49.592 -59.055,-50.862 -59.055,-55.427 -54.657,-59.825 -50.157,-59.825 LeftContact.27@-48.387,-61.595
  Bottom Layer w0.3: D12.6@-49.532,-57.341 -50.173,-57.982 -50.173,-59.442 -48.387,-61.228 LeftContact.27@-48.387,-61.595 -48.387,-62.579 -47.287,-63.679 -47.287,-65.042 CA6.4@-49.178,-66.933
SPI_CS0: sC.6 uC.33 | length 56.2
  Top Layer w0.3: uC.33@-64.006,-36.262 -63.311,-36.957 v1(-61.468,-36.957) ; v1(-45.72,-17.95) -45.323,-17.553 -45.323,-9.662 -42.773,-7.112 -31.877,-7.112 -31.017,-7.972 sC.6@-31.017,-10.692
  Bottom Layer w0.3: v1(-61.468,-36.957) -60.071,-36.957 -45.212,-22.098 -45.212,-18.585 v1@-45.593,-18.204
SPI_CS1: SR3.1 uC.41 | length 50.1
  Top Layer w0.3: uC.41@-64.006,-32.262 -61.133,-32.262 -58.978,-34.417 v1(-55.753,-34.417) ; v1(-32.766,-34.544) -20.26,-34.544 SR3.1@-16.439,-38.365
  Bottom Layer w0.3: v1(-55.753,-34.417) -55.626,-34.544 v1(-32.766,-34.544)
SPI_CS2: SR1.1 uC.39 | length 10
  Top Layer w0.3: uC.39@-64.006,-33.262 -61.547,-33.262 SR1.1@-56.19,-38.619
SPI_CS3: SR2.1 uC.40 | length 29.5
  Top Layer w0.3: uC.40@-64.006,-32.762 -61.34,-32.762 -58.669,-35.433 v1(-54.483,-35.433) ; v1(-50.546,-35.56) -38.929,-35.56 SR2.1@-36.632,-37.857
  Bottom Layer w0.3: v1(-54.483,-35.433) -54.356,-35.56 v1(-50.546,-35.56)
SPI_SCK: sC.3 SR1.2 SR2.2 SR3.2 uC.49 | length 135.2
  Top Layer w0.3: uC.49@-65.781,-26.987 -59.5,-26.987 v1(-58.293,-28.194) -55.046,-28.194 -51.363,-31.877 v1(-38.608,-31.877) -34.29,-31.877 -32.423,-33.744 -26.2,-33.744 -26.162,-33.782 -16.51,-33.782 -13.335,-36.957 -13.335,-38.354 -13.996,-39.015 SR3.2@-16.439,-39.015 ; v1(-56.261,-30.226) -53.213,-33.274 -53.213,-37.465 -55.017,-39.269 SR1.2@-56.19,-39.269 ; v1(-48.006,-15.029) -46.823,-13.846 -46.823,-9.04 -43.395,-5.612 -31.256,-5.612 -29.492,-7.376 -29.492,-10.667 -29.517,-10.692 sC.3@-29.492,-10.717 ; v1(-36.957,-33.528) -33.655,-36.83 -33.655,-38.1 -34.062,-38.507 SR2.2@-36.632,-38.507
  Bottom Layer w0.3: v1(-56.261,-30.226) v1(-58.293,-28.194) -56.642,-28.194 -48.641,-20.193 -48.641,-15.664 v1@-48.133,-15.156 ; v1@-38.481,-32.004 v1(-36.957,-33.528)
START: CA7.3 D13.1 R52.1 RightContact.1 SR1.4 | length 41.2
  Top Layer w0.3: RightContact.1@-68.961,-61.468 -67.691,-60.198 R52.1@-67.691,-55.437 -64.77,-52.516 -64.77,-49.475 -61.222,-45.927 -61.222,-42.752 -59.039,-40.569 SR1.4@-56.19,-40.569
  Bottom Layer w0.3: CA7.3@-71.649,-67.187 -71.649,-66.537 -70.104,-64.992 -70.104,-63.373 -68.961,-62.23 RightContact.1@-68.961,-61.468 -71.001,-59.428 -71.001,-59.166 -71.12,-59.047 -71.12,-57.288 -70.71,-56.878 -70.315,-56.878 D13.1@-70.015,-56.578
TRACTIVE: CA7.2 D13.4 R51.1 RightContact.3 SR1.3 | length 42.5
  Top Layer w0.3: RightContact.3@-71.501,-61.468 -74.041,-58.928 -74.041,-56.453 R51.1@-72.644,-55.056 -64.832,-47.244 -63.246,-47.244 -61.722,-45.72 -61.722,-42.545 -59.096,-39.919 SR1.3@-56.19,-39.919
  Bottom Layer w0.3: D13.4@-72.515,-58.478 -71.501,-59.492 RightContact.3@-71.501,-61.468 -72.771,-62.738 -72.771,-64.77 -72.149,-65.392 CA7.2@-72.149,-67.187
VCC_3V3: 12Vreg.10 C3.1 C4.1 C5.2 C9.1 C12.2 C13.2 C15.2 C18.2 C19.2 C21.2 C22.2 C23.2 C24.2 C25.2 C26.2 C27.2 C28.2 C29.1 Can1.3 Can1.5 Can2.3 Can2.5 ConScreen.3 ConScreen.4 JTAG1.9 L2.2 Opto1.1 Opto1.8 Opto2.1 Opto2.8 R3.2 R4.2 R11.1 R26.2 R27.2 R28.2 R29.2 R30.2 R31.2 R32.2 R33.2 R34.2 R35.2 R36.2 R37.2 R38.2 R39.2 R40.2 R41.2 R42.2 R43.2 R44.1 R45.1 R46.1 R47.1 R48.1 R50.1 R51.2 R52.2 sC.9 sC.16 sC.18 SR1.16 SR2.16 SR3.16 uC.5 uC.18 uC.27 uC.28 uC.35 uC.51 | length 314.7
  Top Layer w0.3: C19.2@-97.979,-28.956 -97.979,-26.134 Can1.3@-97.917,-26.072 ; Can1.5@-96.647,-21.172 -96.647,-18.096 C9.1@-96.077,-17.526 ; C3.1@-92.202,-8.066 -92.013,-8.255 Can2.5@-88.683,-8.255 ; C12.2@-87.692,-17.78 Opto1.1@-85.661,-17.78 ; Can2.3@-83.783,-9.525 -80.837,-9.525 C4.1@-80.772,-9.46 ; Opto1.8@-80.201,-17.78 -78.167,-17.78 C13.2@-78.105,-17.718 ; uC.5@-75.056,-30.762 -74.013,-30.762 -72.781,-31.994 ; v3(-74.676,-55.245) -74.233,-55.245 R51.2@-72.644,-53.656 ; v3(-74.041,-39.243) -73.722,-39.562 C29.1@-73.722,-40.386 -72.781,-39.445 uC.18@-72.781,-38.037 -72.781,-31.994 ; v3(-72.644,-13.97) -70.854,-13.97 -70.435,-14.389 -67.487,-14.389 -66.814,-13.716 v3(-65.532,-13.716) ; Opto2.8@-72.136,-17.081 -72.136,-18.35 C18.2@-71.374,-19.112 -71.374,-18.034 v4(-71.12,-17.78) ; Opto2.1@-72.136,-11.621 -72.136,-9.714 C5.2@-72.074,-9.652 ; v1(-71.374,-31.623) -72.41,-31.623 -72.781,-31.994 ; uC.27@-68.281,-38.037 -68.281,-37.166 -67.806,-36.691 ; uC.28@-67.806,-38.037 -67.806,-36.691 ; uC.35@-64.006,-35.262 v1@-66.377,-35.262 ; v1@-62.865,-52.07 R26.2@-62.865,-50.992 ; v3(-62.865,-18.034) -61.468,-16.637 v3(-61.468,-16.256) ; v1(-60.452,-52.324) R27.2@-60.452,-50.992 ; v1(-60.452,-24.003) -61.202,-24.753 C22.2@-62.738,-24.753 -65.774,-24.753 -66.781,-25.76 uC.51@-66.781,-26.987 -66.781,-27.809 -66.377,-28.213 v1@-66.377,-35.262 ; v1(-57.785,-52.324) R28.2@-57.785,-50.992 ; v1(-55.118,-52.324) R29.2@-55.118,-50.992 ; 12Vreg.10@-55.048,-11.501 -55.023,-11.526 -52.308,-11.526 R3.2@-52.07,-11.764 ; v1(-52.197,-52.324) R30.2@-52.197,-50.992 ; SR1.16@-50.49,-38.619 -49.652,-37.781 C23.2@-48.006,-37.781 C24.2@-46.228,-37.781 -45.785,-37.338 v1(-44.831,-37.338) ; v1@-49.53,-52.197 R31.2@-49.53,-50.992 ; v1@-46.863,-52.197 R32.2@-46.863,-50.992 ; v1(-44.196,-52.324) R33.2@-44.196,-50.992 ; v1(-41.529,-52.324) R34.2@-41.529,-50.992 ; v1(-38.735,-52.324) R35.2@-38.735,-50.992 ; v6(-36.322,-12.7) -36.005,-13.017 sC.16@-34.792,-13.017 ; v6(-36.068,-14.478) -35.632,-14.042 sC.18@-34.792,-14.042 ; v1@-34.671,-52.197 -34.671,-51.754 R36.2@-33.909,-50.992 ; sC.9@-32.492,-10.717 -32.492,-8.046 R4.2@-32.447,-8.001 -32.447,-8.32 v4(-31.75,-9.017) ; v1@-31.623,-52.197 -31.369,-51.943 R37.2@-31.369,-50.992 ; SR2.16@-30.932,-37.857 -29.967,-36.892 C25.2@-28.575,-36.892 C26.2@-26.797,-36.892 -24.892,-38.797 v1(-24.892,-48.26) -24.892,-49.595 R39.2@-26.289,-50.992 ; v1(-28.829,-52.324) R38.2@-28.829,-50.992 ; R40.2@-23.749,-50.992 -22.479,-49.722 v1(-22.479,-48.26) ; v1(-19.939,-51.943) -20.258,-51.943 R41.2@-21.209,-50.992 R42.2@-18.669,-50.992 ; R43.2@-16.129,-50.992 -14.924,-50.992 -13.97,-50.038 v1(-13.97,-48.26) ; v1@-12.954,-52.07 -12.954,-51.754 R44.1@-12.192,-50.992 ; SR3.16@-10.739,-38.365 -8.585,-38.365 C27.2@-8.509,-38.289 C28.2@-6.604,-38.289 ; v1@-10.541,-52.197 -10.541,-52.135 R45.1@-9.398,-50.992 ; v1(-8.001,-52.324) -6.731,-51.054 R46.1@-6.731,-50.992 ; v1(-5.08,-52.451) -5.08,-52.135 R47.1@-3.937,-50.992 ; v1@-1.524,-52.324 R48.1@-1.524,-50.992 ; -67.806,-36.691 v1@-66.377,-35.262
  Top Layer w0.6: R3.2@-52.07,-11.764 R3.2@-51.736,-12.098
  Bottom Layer w0.3: JTAG1.9@-86.741,-25.781 -85.301,-27.221 -78.665,-27.221 -78.581,-27.305 -75.692,-27.305 v1(-71.374,-31.623) ; v3(-79.629,-57.912) -77.343,-57.912 v3(-74.676,-55.245) -73.749,-54.318 -73.749,-49.58 -74.041,-49.288 v3(-74.041,-39.243) ; v4(-71.12,-17.78) -68.961,-17.78 v6(-68.707,-17.526) ; v1(-63.627,-54.483) -62.738,-53.594 v1(-62.738,-52.324) v1(-60.452,-52.324) v1(-57.785,-52.324) v1(-55.118,-52.324) v1(-52.197,-52.324) v1(-49.276,-52.324) ; v1(-60.452,-24.003) -58.293,-24.003 -55.88,-21.59 v3@-55.88,-20.447 ; v1(-44.831,-37.338) -49.276,-41.783 v1(-49.276,-52.324) ; v1(-38.1,-18.796) -36.068,-16.764 v6(-36.068,-14.478) -36.322,-14.224 v6(-36.322,-12.7) ; v4(-31.75,-9.017) v1(-27.559,-9.017) ; v1(-24.892,-48.26) v1(-22.479,-48.26) -22.479,-51.562 -21.717,-52.324 ; v1(-17.526,-20.828) -18.034,-21.336 -18.034,-22.098 -19.563,-23.627 ConScreen.4@-19.563,-24.707 ConScreen.3@-19.063,-24.707 -19.063,-23.762 -17.653,-22.352 v1(-16.256,-22.352) ; v1(-13.97,-48.26) -13.97,-51.435 v1@-13.462,-51.943 ; v1(-1.524,-52.578) -1.651,-52.451 v1(-5.08,-52.451) -5.207,-52.324 v1(-8.001,-52.324) v1(-10.668,-52.324) -10.795,-52.197 v1(-13.208,-52.197) v1@-13.462,-51.943 ; v1(-49.276,-52.324) -46.99,-52.324 v1(-46.863,-52.451) -44.323,-52.451 v1(-44.196,-52.324) v1(-41.529,-52.324) v1(-38.735,-52.324) -35.052,-52.324 v1(-34.925,-52.451) -32.004,-52.451 v1(-31.877,-52.324) v1(-28.829,-52.324) -21.717,-52.324 ; -21.717,-52.324 -20.32,-52.324 v1(-19.939,-51.943) v1@-13.462,-51.943
  other v1: -66.421,-35.306
  other v3: -55.753,-20.193
VSYNC: ConScreen.33 sC.26 | length 10.8
  Top Layer w0.3: v1(-37.084,-19.855) -35.814,-18.585 -33.863,-18.585 -33.517,-18.239 -33.517,-17.842 sC.26@-33.492,-17.817
  Bottom Layer w0.3: v1(-37.084,-19.855) -37.084,-20.744 -34.063,-23.765 ConScreen.33@-34.063,-24.707
WARNING_1: NMOS3.1 R17.1 uC.9 | length 20.2
  Top Layer w0.3: NMOS3.1@-88,-42.606 -86.53,-41.136 R17.1@-85.471,-41.136 -84.824,-41.136 -83.185,-39.497 -83.185,-34.028 -81.919,-32.762 uC.9@-75.056,-32.762
WARNING_2: NMOS4.1 R18.1 uC.10 | length 18
  Top Layer w0.3: NMOS4.1@-83.555,-45.019 -81.546,-43.01 R18.1@-81.546,-41.148 -81.546,-35.052 -79.756,-33.262 uC.10@-75.056,-33.262
WARNING_3: NMOS5.1 R21.1 uC.11 | length 25
  Top Layer w0.3: NMOS5.1@-87.873,-49.845 -85.036,-49.845 R21.1@-84.709,-49.518 -84.697,-49.518 -80.645,-45.466 -80.645,-36.048 -78.359,-33.762 uC.11@-75.056,-33.762
WARNING_4: NMOS6.1 R22.1 uC.12 | length 24.8
  Top Layer w0.3: NMOS6.1@-83.174,-53.909 -81.026,-51.761 R22.1@-81.026,-49.518 -80.01,-48.502 -80.01,-36.12 -78.152,-34.262 uC.12@-75.056,-34.262
WARNING_5: NMOS2.1 R15.1 uC.8 | length 15.6
  Top Layer w0.3: NMOS2.1@-87.365,-37.272 -85.036,-37.272 R15.1@-84.963,-37.199 -83.693,-35.929 -83.693,-33.786 -82.169,-32.262 uC.8@-75.056,-32.262
WARNING_LC: NMOS7.1 R55.2 uC.13 | length 31.9
  Top Layer w0.3: NMOS7.1@-87.873,-57.846 -85.29,-57.846 R55.2@-85.09,-57.646 -83.554,-57.646 -79.51,-53.602 -79.51,-37.31 -76.962,-34.762 uC.13@-75.056,-34.762
pads on no net: CA6.2 CA7.4 ConScreen.34 ConScreen.35 ConScreen.36 ConScreen.37 ConScreen.38 D7.5 D8.5 D9.5 D10.5 D11.5 D12.3 D12.5 D13.3 D13.5 JTAG1.4 JTAG1.7 LeftContact.1 LeftContact.9 LeftContact.30 sC.1 sC.7 sC.8 sC.19 sC.20 sC.21 sC.22 sC.24 sC.25 SR1.7 SR2.7 SR3.7 uC.14 uC.15 uC.21 uC.22 uC.23 uC.24 uC.25 uC.38 uC.42 uC.43 uC.44 uC.45 uC.46 uC.60 uC.61
copper on no net:
  other v5: -103.378,-71.374 0,-71.374 -103.378,0 0,0

## Polygon pours and split planes (outlines as drawn)
VCC_3V3 on Top Layer "VCC" (solid, pour order 16): -104.474,-2.095 -104.474,-46.99 -99.949,-46.99 -99.314,-46.355 -99.314,-32.385 -90.17,-23.241 -83.058,-23.241 -83.058,-14.605 -82.931,-14.732 -69.215,-14.732 -69.215,-9.398 -69.723,-8.89 -69.85,-8.89 -74.93,-8.89 -75.057,-8.763 -77.089,-6.731 -84.709,-6.731 -85.471,-5.969 -85.471,-2.095 -104.474,-2.095
VCC_3V3 on Top Layer "VCC" (solid, pour order 20): -85.344,-2.095 -85.344,-5.842 -84.582,-6.604 -77.216,-6.604 -76.962,-6.604 -74.93,-8.636 -69.85,-8.636 -69.723,-8.636 -68.961,-9.398 -68.961,-14.605 -64.389,-14.605 -62.103,-16.891 -60.325,-18.669 -50.292,-18.669 -49.911,-18.288 -49.911,-7.874 -46.482,-4.445 -13.843,-4.445 -12.827,-5.461 -12.827,-21.336 -17.526,-26.035 -17.653,-26.162 -36.449,-26.162 -36.576,-26.162 -37.338,-25.4 -37.211,-25.273 -37.211,-23.876 -38.1,-23.876 -38.1,-28.702 -38.1,-28.829 -37.084,-29.845 1.026,-29.845 1.026,-2.095 -85.471,-2.095
VCC_3V3 on Top Layer "VCC" (solid, pour order 24): -104.267,-47.117 -99.822,-47.117 -99.187,-46.482 -99.187,-32.512 -99.06,-32.512 -90.043,-23.495 -82.804,-23.495 -82.804,-14.986 -82.677,-14.859 -64.516,-14.859 -60.452,-18.923 -50.292,-18.923 -49.657,-18.288 -49.657,-7.874 -49.53,-7.874 -46.355,-4.699 -13.843,-4.699 -13.081,-5.461 -13.081,-21.336 -17.653,-25.908 -36.576,-25.908 -36.957,-25.273 -36.957,-25.146 -37.084,-25.146 -37.084,-23.622 -38.354,-23.622 -38.354,-28.702 -36.957,-30.099 1.026,-30.099 1.026,-69.295 -104.474,-69.295 -104.474,-46.99
GND on Mid-Layer 2 "GND" (solid, pour order 15): -104.474,-2.349 -104.474,-46.99 -99.949,-46.99 -99.314,-46.355 -99.314,-32.639 -89.916,-23.241 -83.058,-23.241 -83.058,-14.859 -69.215,-14.859 -69.215,-9.652 -69.723,-9.144 -74.93,-9.144 -77.089,-6.985 -84.709,-6.985 -85.471,-6.223 -85.471,-2.349
GND on Mid-Layer 2 "GND" (solid, pour order 23): -104.267,-47.117 -99.822,-47.117 -99.187,-46.482 -99.187,-32.766 -99.06,-32.512 -90.043,-23.495 -82.804,-23.495 -82.804,-15.113 -82.55,-15.113 -64.516,-14.986 -60.452,-18.923 -50.292,-18.923 -49.657,-18.288 -49.657,-7.874 -49.53,-7.874 -46.355,-4.699 -13.843,-4.699 -13.081,-5.461 -13.081,-21.336 -17.653,-25.908 -36.576,-25.908 -36.957,-25.273 -36.957,-25.146 -37.084,-25.146 -37.084,-23.622 -38.354,-23.622 -38.354,-28.702 -36.957,-30.099 1.026,-30.099 1.026,-69.295 -104.474,-69.295 -104.474,-46.99
GND on Mid-Layer 2 "GND" (solid, pour order 19): -85.471,-2.095 -85.471,-5.842 -84.709,-6.604 -77.089,-6.604 -75.057,-8.636 -69.85,-8.636 -69.088,-9.398 -69.088,-14.605 -64.516,-14.605 -60.452,-18.669 -50.419,-18.669 -50.038,-18.288 -50.038,-7.874 -46.609,-4.445 -13.97,-4.445 -12.954,-5.461 -12.954,-21.336 -17.78,-26.162 -36.703,-26.162 -37.465,-25.4 -37.338,-25.273 -37.338,-23.876 -38.227,-23.876 -38.1,-28.702 -37.084,-29.718 0.899,-29.845 0.899,-2.095
GND on Mid-Layer 1 "GND" (solid, pour order 18): -85.344,-2.095 -85.344,-5.842 -84.582,-6.604 -77.216,-6.604 -76.962,-6.604 -74.93,-8.636 -69.85,-8.636 -69.723,-8.636 -68.961,-9.398 -68.961,-14.605 -64.389,-14.605 -62.103,-16.891 -60.325,-18.669 -50.292,-18.669 -49.911,-18.288 -49.911,-7.874 -46.482,-4.445 -13.843,-4.445 -12.827,-5.461 -12.827,-21.336 -17.526,-26.035 -17.653,-26.162 -36.449,-26.162 -36.576,-26.162 -37.338,-25.4 -37.211,-25.273 -37.211,-23.876 -38.1,-23.876 -38.1,-28.702 -38.1,-28.829 -37.084,-29.845 1.026,-29.845 1.026,-2.095 -85.471,-2.095
GND on Mid-Layer 1 "GND" (solid, pour order 22): -104.267,-47.117 -99.822,-47.117 -99.187,-46.482 -99.187,-32.766 -99.06,-32.512 -90.043,-23.495 -82.804,-23.495 -82.804,-15.113 -82.55,-15.113 -64.516,-14.986 -60.452,-18.923 -50.292,-18.923 -49.657,-18.288 -49.657,-7.874 -49.53,-7.874 -46.355,-4.699 -13.843,-4.699 -13.081,-5.461 -13.081,-21.336 -17.653,-25.908 -36.576,-25.908 -36.957,-25.273 -36.957,-25.146 -37.084,-25.146 -37.084,-23.622 -38.354,-23.622 -38.354,-28.702 -36.957,-30.099 1.026,-30.099 1.026,-69.295 -104.474,-69.295 -104.474,-46.99
GND on Mid-Layer 1 "GND" (solid, pour order 14): -104.474,-2.349 -104.474,-46.99 -99.949,-46.99 -99.314,-46.355 -99.314,-32.639 -89.916,-23.241 -83.058,-23.241 -83.058,-14.859 -69.215,-14.859 -69.215,-9.652 -69.723,-9.144 -74.93,-9.144 -77.089,-6.985 -84.709,-6.985 -85.471,-6.223 -85.471,-2.349
GND on Bottom Layer "GND" (solid, pour order 21): -104.267,-47.117 -99.822,-47.117 -99.187,-46.482 -99.187,-32.766 -99.06,-32.512 -90.043,-23.495 -82.804,-23.495 -82.804,-15.113 -82.55,-15.113 -64.516,-14.986 -60.452,-18.923 -50.292,-18.923 -49.657,-18.288 -49.657,-7.874 -49.53,-7.874 -46.355,-4.699 -13.843,-4.699 -13.081,-5.461 -13.081,-21.336 -17.653,-25.908 -36.576,-25.908 -36.957,-25.273 -36.957,-25.146 -37.084,-25.146 -37.084,-23.622 -38.354,-23.622 -38.354,-28.702 -36.957,-30.099 1.026,-30.099 1.026,-69.295 -104.474,-69.295 -104.474,-46.99
GND on Bottom Layer "GND" (solid, pour order 13): -104.474,-2.349 -104.474,-46.99 -99.949,-46.99 -99.314,-46.355 -99.314,-32.639 -89.916,-23.241 -83.058,-23.241 -83.058,-14.859 -69.215,-14.859 -69.215,-9.652 -69.723,-9.144 -74.93,-9.144 -77.089,-6.985 -84.709,-6.985 -85.471,-6.223 -85.471,-2.349
GND on Bottom Layer "GND" (solid, pour order 17): -85.344,-2.095 -85.344,-5.842 -84.582,-6.604 -77.216,-6.604 -76.962,-6.604 -74.93,-8.636 -69.85,-8.636 -69.723,-8.636 -68.961,-9.398 -68.961,-14.605 -64.389,-14.605 -62.103,-16.891 -60.325,-18.669 -50.292,-18.669 -49.911,-18.288 -49.911,-7.874 -46.482,-4.445 -13.843,-4.445 -12.827,-5.461 -12.827,-21.336 -17.526,-26.035 -17.653,-26.162 -36.449,-26.162 -36.576,-26.162 -37.338,-25.4 -37.211,-25.273 -37.211,-23.876 -38.1,-23.876 -38.1,-28.702 -38.1,-28.829 -37.084,-29.845 1.026,-29.845 1.026,-2.095 -85.471,-2.095

## Keep-outs
Keep-Out Layer:
  lines w0.3: -104.474,-69.295 -104.474,-2.095 1.026,-2.095 1.026,-69.295 -104.474,-69.295

## Silkscreen, mask and mechanical layers (free items; w line width, h text height)
Top Overlay:
  lines w0.05: -96.266,-29.21 -96.139,-29.21 ; -96.203,-29.273 -96.203,-29.21 ; -83.058,-14.605 -82.931,-14.732
  lines w0.1: -104.267,-46.99 -99.949,-46.99 -99.314,-46.355 -99.314,-32.385 -96.203,-29.273 ; -96.139,-29.21 -90.17,-23.241 -83.058,-23.241 -83.058,-14.605 ; -85.471,-2.159 -85.471,-5.969 -84.709,-6.731 -77.089,-6.731 -75.057,-8.763 -69.85,-8.763 -69.215,-9.398 -69.215,-14.732 ; -82.931,-14.732 -64.643,-14.732 -64.516,-14.732 -61.722,-17.526 -60.452,-18.796 -50.292,-18.796 -49.784,-18.288 -49.784,-7.874 -46.482,-4.572 -13.843,-4.572 -12.954,-5.461 -12.954,-21.336 -17.653,-26.035 -36.576,-26.035 -37.211,-25.4 -37.211,-23.749 -38.227,-23.749 -38.227,-28.702 -37.084,-29.845 0.635,-29.845
  text "Oystein A. Smith" at -40.132,-22.987 h1.52
Bottom Overlay:
  text "Oystein A. Smith" at -76.962,-68.199 h1.52

## Dimensions
-104.474,-69.295 to -104.474,-2.095 on Mechanical 1
-104.474,-69.295 to 1.026,-69.295 on Mechanical 1

## Text inside footprints (layer, text, board x,y; h text height)
ConScreen: Bottom Overlay "1" at -17.813,-23.607 h0.6; Bottom Overlay "40" at -36.463,-23.607 h0.6
LED&BUZZ: Top Overlay "13" at -98.425,-37.846 h0.6; Top Overlay "14" at -100.838,-37.846 h0.6; Top Overlay "1" at -97.282,-58.928 h0.6 r90; Top Overlay "2" at -99.822,-58.928 h0.6 r90
LeftContact: Top Overlay "1" at -12.446,-61.087 h0.6 r180; Top Overlay "2" at -12.192,-63.881 h0.6 r180; Top Overlay "29" at -54.102,-61.087 h0.6 r180; Top Overlay "30" at -53.975,-63.627 h0.6 r180
PWR&CAN: Top Overlay "6" at -97.79,-14.605 h0.6 r270; Top Overlay "5" at -100.33,-14.605 h0.6 r270; Top Overlay "2" at -97.663,-5.842 h0.6 r270; Top Overlay "1" at -100.33,-5.969 h0.6 r270
RightContact: Top Overlay "1" at -66.929,-60.96 h0.6 r180; Top Overlay "2" at -66.421,-63.5 h0.6 r180; Top Overlay "5" at -75.565,-60.96 h0.6 r180; Top Overlay "6" at -75.565,-63.5 h0.6 r180